# EAGLE board XC95114XL_trainer (EAGLE 7.1.0)
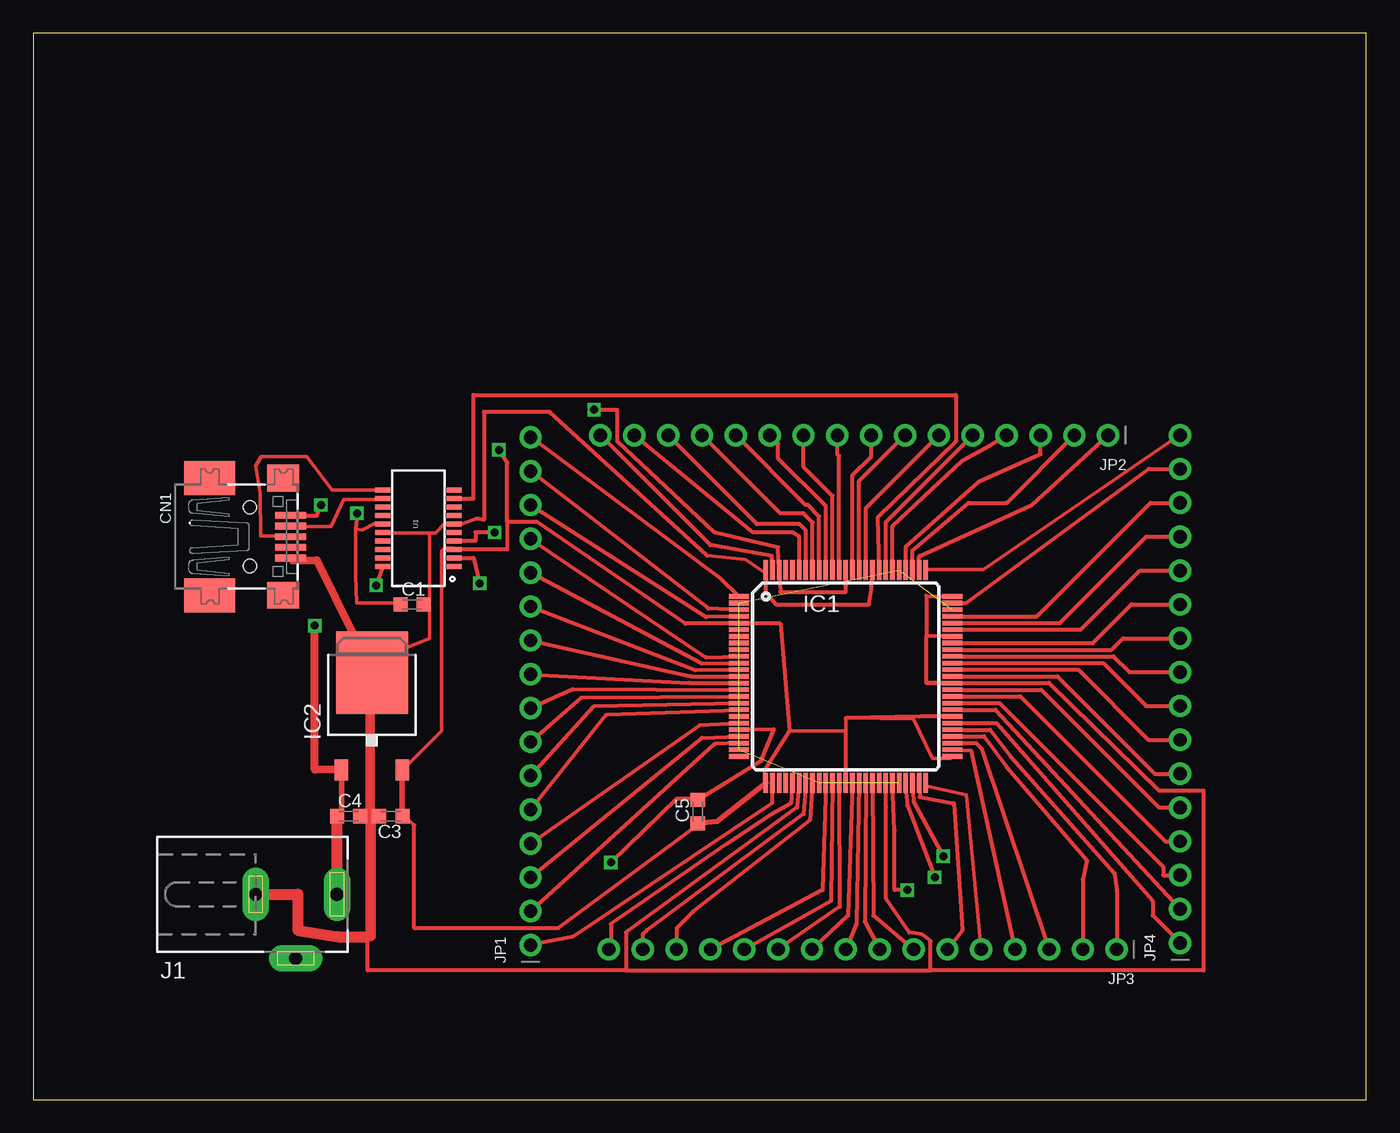
[diagram p0: board, top side]
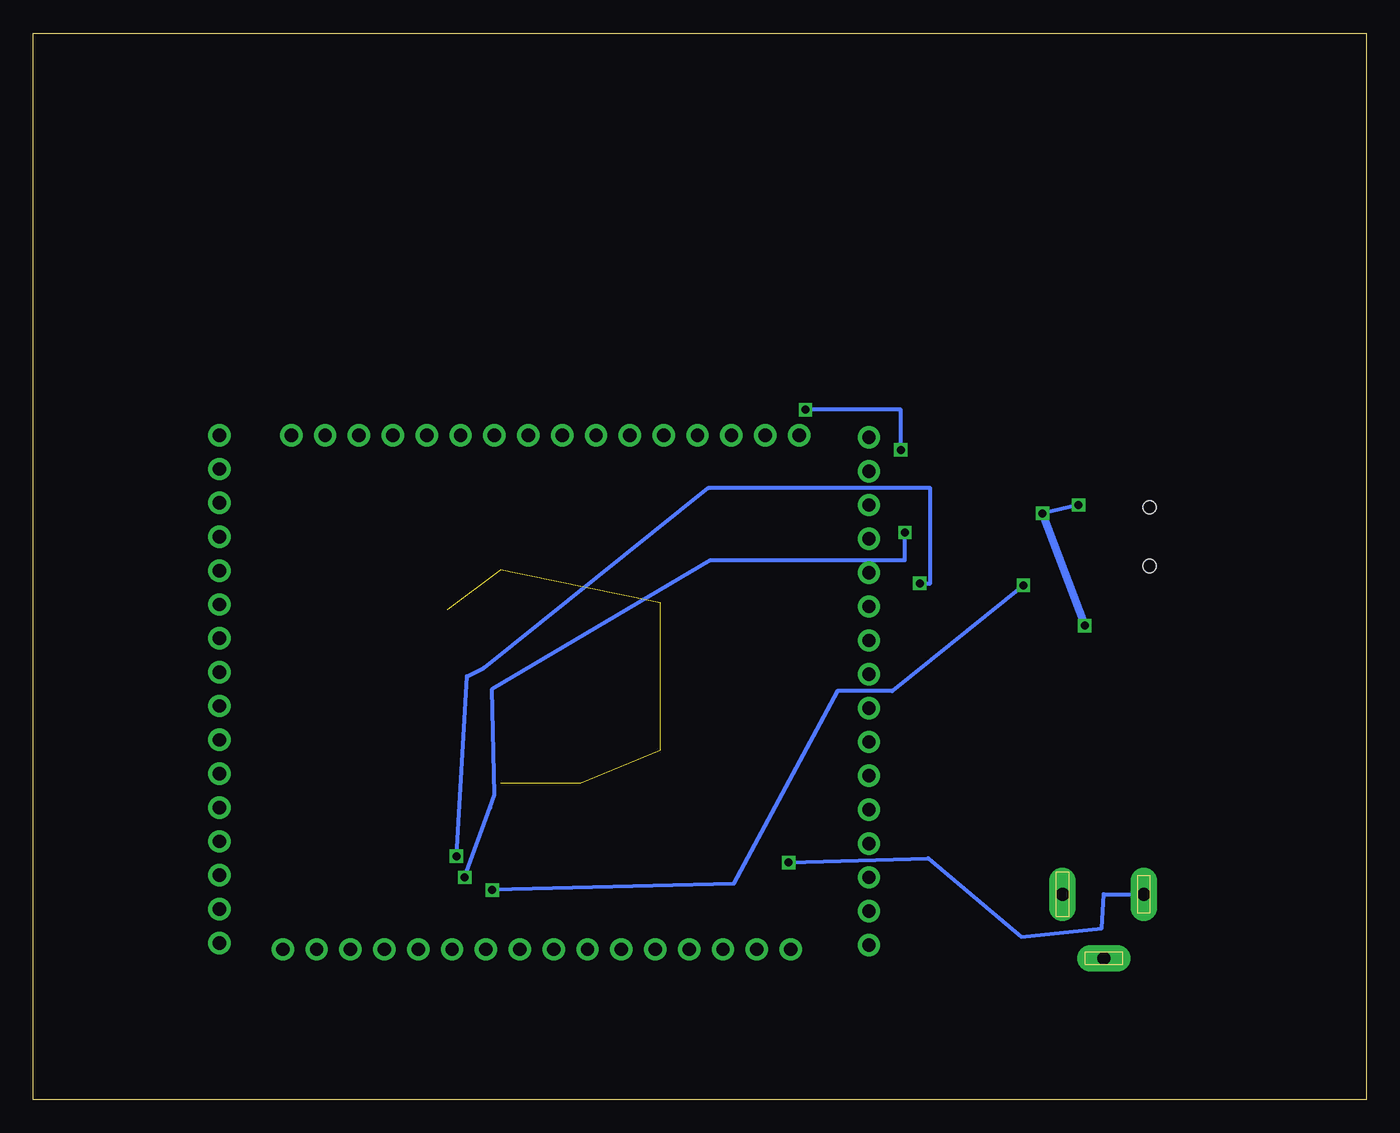
[diagram p1: board, bottom side, seen from below]

Size 100 x 80 mm. Coordinates in mm from the lower left corner, seen from the top.
Outline: 0,0 100,0 100,80 0,80 0,0
Copper layers (1*16): Top 0.035mm / dielectric 1.5mm / Bottom 0.035mm
Design rules "default": minimum track width 10mil, minimum drill 24mil, track to track 8mil, track to pad 8mil, pad to pad 8mil, via to via 8mil, smd to smd 8mil, copper to edge 40mil, drill to drill 8mil, minimum pad ring 10mil, minimum via ring 8mil, stop-mask expansion 4mil, vias tented up to drill 0mil, thermal gap 10mil
vRestrict: area 27,38.4 to 30.8,47.3; area 73,-11.7 to 86.7,2.9

## Footprints (pad centres in the part's own frame; a part is rotated, then mirrored left to right if it is on the bottom)
C0603K = smd 1.05 x 1.08: 1 -0.875,0; 2 0.875,0
USB-MINIB_LARGER = smd 0.5 x 2.308: D+ 0,4.064; D- -0.8,4.064; GND 1.6,4.064; ID 0.8,4.064; VBUS -1.6,4.064 | smd 2.54 x 3.81: GND1 -4.4,-2; GND4 4.4,-2 | smd 2 x 2.4: GND2 -4.4,3.5; GND3 4.4,3.5 | hole 1: -2.2,1; 2.2,1
TQ100 = smd 1.5 x 0.35: 1 -8,6; 2 -8,5.5; 3 -8,5; 4 -8,4.5; 5 -8,4; 6 -8,3.5; 7 -8,3; 8 -8,2.5; 9 -8,2; 10 -8,1.5; 11 -8,1; 12 -8,0.5; 13 -8,0; 14 -8,-0.5; 15 -8,-1; 16 -8,-1.5; 17 -8,-2; 18 -8,-2.5; 19 -8,-3; 20 -8,-3.5; 21 -8,-4; 22 -8,-4.5; 23 -8,-5; 24 -8,-5.5; 25 -8,-6; 51 8,-6; 52 8,-5.5; 53 8,-5; 54 8,-4.5; 55 8,-4; 56 8,-3.5; 57 8,-3; 58 8,-2.5; 59 8,-2; 60 8,-1.5; 61 8,-1; 62 8,-0.5; 63 8,0; 64 8,0.5; 65 8,1; 66 8,1.5; 67 8,2; 68 8,2.5; 69 8,3; 70 8,3.5; 71 8,4; 72 8,4.5; 73 8,5; 74 8,5.5; 75 8,6 | smd 0.35 x 1.5: 26 -6,-8; 27 -5.5,-8; 28 -5,-8; 29 -4.5,-8; 30 -4,-8; 31 -3.5,-8; 32 -3,-8; 33 -2.5,-8; 34 -2,-8; 35 -1.5,-8; 36 -1,-8; 37 -0.5,-8; 38 0,-8; 39 0.5,-8; 40 1,-8; 41 1.5,-8; 42 2,-8; 43 2.5,-8; 44 3,-8; 45 3.5,-8; 46 4,-8; 47 4.5,-8; 48 5,-8; 49 5.5,-8; 50 6,-8; 76 6,8; 77 5.5,8; 78 5,8; 79 4.5,8; 80 4,8; 81 3.5,8; 82 3,8; 83 2.5,8; 84 2,8; 85 1.5,8; 86 1,8; 87 0.5,8; 88 0,8; 89 -0.5,8; 90 -1,8; 91 -1.5,8; 92 -2,8; 93 -2.5,8; 94 -3,8; 95 -3.5,8; 96 -4,8; 97 -4.5,8; 98 -5,8; 99 -5.5,8; 100 -6,8
TO252 = smd 1 x 1.6: 1 -2.28,-4.8; 2 2.28,-4.8 | smd 5.4 x 6.2: 3 0,2.5
DCJ0303 = drill 1 pad 2 long: 1 0,3.1; 2 4.8,0; 3 0,-3
1X16_ROUND = drill 1 pad 1.676: 1 -19.05,0; 2 -16.51,0; 3 -13.97,0; 4 -11.43,0; 5 -8.89,0; 6 -6.35,0; 7 -3.81,0; 8 -1.27,0; 9 1.27,0; 10 3.81,0; 11 6.35,0; 12 8.89,0; 13 11.43,0; 14 13.97,0; 15 16.51,0; 16 19.05,0
SSOP20_L = smd 0.381 x 1.143: 1 -2.857,-2.68; 2 -2.223,-2.68; 3 -1.587,-2.68; 4 -0.953,-2.68; 5 -0.318,-2.68; 6 0.318,-2.68; 7 0.953,-2.68; 8 1.587,-2.68; 9 2.223,-2.68; 10 2.857,-2.68; 11 2.857,2.68; 12 2.223,2.68; 13 1.587,2.68; 14 0.953,2.68; 15 0.318,2.68; 16 -0.318,2.68; 17 -0.953,2.68; 18 -1.587,2.68; 19 -2.223,2.68; 20 -2.857,2.68

## Placement (x,y rotation side)
C1  [C0603K]  28.42,37.15 0 top
C3  [C0603K]  26.83,21.27 180 top
C4  [C0603K]  23.65,21.27 0 top
C5  [C0603K]  49.85,21.59 90 top
CN1  [USB-MINIB_LARGER]  15.24,42.23 270 top
IC1  XC9572XL-TQ100  [TQ100]  60.96,31.75 0 top
IC2  7805DT  [TO252]  25.4,29.53 0 top
J1  [DCJ0303]  19.68,15.4 270 top
JP1  [1X16_ROUND]  37.31,30.64 90 top
JP2  [1X16_ROUND]  61.59,49.85 180 top
JP3  [1X16_ROUND]  62.23,11.27 180 top
JP4  [1X16_ROUND]  86.04,30.8 90 top
U1  FTS31XS-U  [SSOP20_L]  28.89,42.86 90 top

## Library data of the parts
C1 C3-C5 = rcl
CN1 JP1-JP4 = OLED_mod
IC1 = XC9500XLneu
IC2 = linear
J1 = con-jack; OC_FARNELL: unknown; OC_NEWARK: unknown
U1 = SparkFun-DigitalIC; PROD_ID: IC-11524

## Nets
3.3V: C3.1 C5.1 IC1.5 IC1.26 IC1.38 IC1.51 IC1.57 IC1.88 IC1.98 IC2.2 U1.3
+5V: C1.1 C4.1 CN1.VBUS IC2.1 J1.1 U1.15
GND: C1.2 C3.2 C4.2 C5.2 CN1.GND IC1.21 IC1.31 IC1.44 IC1.62 IC1.69 IC1.75 IC1.84 IC1.100 IC2.3 J1.3 U1.6 U1.16
N$1: CN1.D+ U1.11
N$3: CN1.D- U1.12
N$4: IC1.55 JP3.1
N$5: IC1.54 JP3.2
N$6: IC1.48 U1.2
N$7: IC1.53 JP3.3
N$8: IC1.47 U1.4
N$9: IC1.45 U1.20
N$10: IC1.83 U1.9
N$11: IC1.52 JP3.4
N$12: IC1.50 JP3.5
N$13: IC1.49 JP3.6
N$14: IC1.42 JP3.7
N$15: IC1.41 JP3.8
N$16: IC1.40 JP3.9
N$17: IC1.39 JP3.10
N$18: IC1.37 JP3.11
N$19: IC1.36 JP3.12
N$20: IC1.35 JP3.13
N$21: IC1.33 JP3.14
N$22: IC1.32 JP3.15
N$23: IC1.30 JP3.16
N$24: IC1.22 JP1.3
N$25: IC1.23 JP1.2
N$26: IC1.27 JP1.1
N$27: IC1.20 JP1.4
N$28: IC1.18 JP1.5
N$29: IC1.17 JP1.6
N$30: IC1.16 JP1.7
N$31: IC1.15 JP1.8
N$32: IC1.14 JP1.9
N$33: IC1.13 JP1.10
N$34: IC1.12 JP1.11
N$35: IC1.11 JP1.12
N$36: IC1.10 JP1.13
N$37: IC1.1 JP1.16
N$38: IC1.3 JP1.15
N$39: IC1.4 JP1.14
N$40: IC1.56 JP4.1
N$41: IC1.58 JP4.2
N$42: IC1.59 JP4.3
N$43: IC1.60 JP4.4
N$44: IC1.61 JP4.5
N$45: IC1.63 JP4.6
N$46: IC1.64 JP4.7
N$47: IC1.65 JP4.8
N$48: IC1.66 JP4.9
N$49: IC1.67 JP4.10
N$50: IC1.68 JP4.11
N$51: IC1.70 JP4.12
N$52: IC1.71 JP4.13
N$53: IC1.72 JP4.14
N$54: IC1.74 JP4.15
N$55: IC1.76 JP4.16
N$56: IC1.77 JP2.1
N$57: IC1.78 JP2.2
N$58: IC1.79 JP2.3
N$59: IC1.81 JP2.4
N$60: IC1.82 JP2.5
N$61: IC1.85 JP2.6
N$62: IC1.86 JP2.7
N$63: IC1.87 JP2.8
N$64: IC1.89 JP2.9
N$65: IC1.90 JP2.10
N$66: IC1.91 JP2.11
N$67: IC1.92 JP2.12
N$68: IC1.93 JP2.13
N$69: IC1.94 JP2.14
N$70: IC1.95 JP2.15
N$71: IC1.99 JP2.16
NC: IC1.2 IC1.7 IC1.19 IC1.24 IC1.34 IC1.43 IC1.46 IC1.73 IC1.80

## Tracks (layer width: path | path; a pad name or v marks a point on that pad's centre or on a via)
3.3V  (via drill 0.6)
  Top 0.254: IC1.51 68.81,25.6 67.47,25.6 66.04,28.57 60.96,28.62 60.96,27.67 56.73,27.67 54.86,24.69 54.86,23.77 IC1.26 | U1.3 31.55,41.38 30.86,41.38 30.63,41.15 30.63,27.66 27.89,24.92 IC2.2 | 28.57,20.57 27.89,21.26 C3.1 | 49.84,20.57 C5.1
  Top 0.305: IC1.57 66.52,28.73 60.96,28.62 | IC1.38 60.96,27.67 | 49.84,20.57 39.37,12.86 28.57,12.86 28.57,20.57 | IC1.88 60.96,38.1 56.04,38.1 IC1.98 55.88,41.43 51.12,42.55 43.81,49.37 43.81,51.75 v42.07,51.75 | IC1.5 56.04,35.72 | 56.04,35.72 56.73,27.67 | 56.04,35.72 48.9,35.72 37.78,43.34 35.56,43.34 | 35.56,43.34 35.56,41.27 31.59,41.27 | 35.56,43.34 35.56,47.78 v34.92,48.74
  Top 0.406: C5.1 51.31,20.87 IC1.26 | C3.1 27.68,21.27 IC2.2
  Bottom 0.305: v34.92,48.74 34.92,51.75 v42.07,51.75
+5V  (via drill 0.6)
  Top 0.254: C1.1 27.89,37.26 24.24,37.26 24.17,39.32 24.19,42.79 24.67,42.75 25.6,43.2 26.06,43.2 U1.15
  Top 0.305: CN1.VBUS 21.27,43.81 v21.59,44.61 | v24.29,43.97 24.19,42.79
  Top 0.406: C4.1 23.12,21.27 IC2.1
  Top 0.61: IC2.1 21.11,24.77 v21.11,35.56
  Top 0.813: J1.1 C4.1
  Bottom 0.305: v21.59,44.61 v24.29,43.97
  Bottom 0.61: v21.11,35.56 v24.29,43.97
GND  (via drill 0.6)
  Top 0.254: 50.55,40.8 53.42,40.5 54.86,39.55 IC1.100 | 29.72,42.52 30.18,42.52 30.86,43.2 31.55,43.2 U1.6 31.77,43.2 32.23,43.2 33.26,43.59 | 29.72,42.52 26.29,42.52 U1.16 | 26.75,33.38 25.6,32.23 IC2.3 26.75,33.38 | 26.75,33.38 29.72,34.6 29.72,37.03 C1.2 29.72,37.26 29.72,42.52 | 26.75,33.38 26.52,33.38 | 19.43,40.46 CN1.GND
  Top 0.305: 52.96,27.78 IC1.21 55.56,27.78 54.61,25.4 | C5.2 54.61,25.4 | 50.55,40.8 38.73,51.59 33.81,51.59 33.81,43.5 33.26,43.59 | IC1.100 54.93,38.1 55.72,37.15 62.71,37.15 62.87,38.26 IC1.84 | IC1.62 66.99,31.27 | 66.99,31.27 66.99,34.77 | IC1.69 66.99,34.77 | IC1.75 66.99,37.78 66.99,34.77 | 44.45,9.68 67.31,9.68 | 67.31,9.68 67.31,11.91 66.67,12.38 65.72,12.54 63.98,15.08 63.98,21.91 IC1.44 | IC1.31 57.31,21.91 44.45,12.54 44.45,9.68 | 44.45,9.68 25.08,9.68 25.08,12.22 25.08,21.27 | 66.99,31.27 76.2,31.27 84.45,23.18 87.79,23.18 87.79,9.68 67.31,9.68 | 54.61,25.4 50.01,22.54 48.26,22.54 v43.34,17.78
  Top 0.406: C4.2 25.08,21.27 C3.2 25.4,21.27 25.4,21.59 IC2.3
  Top 0.61: 25.08,12.22 25.4,12.22 25.4,21.59 25.24,21.59 25.24,30.96 | 19.43,40.46 21.27,40.48 IC2.3
  Top 0.813: J1.3 19.84,15.4 19.84,12.7 22.86,12.22 25.08,12.22
  Bottom 0.305: v43.34,17.78 32.86,18.1 25.88,12.22 19.84,12.86 19.68,15.4 J1.3
N$1
  Top 0.254: U1.11 22.4,45.72 20.52,48.23 17.07,48.23 16.69,47.53 17,45.51 17.05,42.29 19.2,42.29 CN1.D+
N$3
  Top 0.254: U1.12 26.06,45.03 23.3,45.03 22.35,42.98 19.43,42.98 CN1.D-
N$4
  Top 0.305: IC1.55 71.79,27.75 73.34,25.72 81.12,16.99 81.28,15.72 JP3.1
N$5
  Top 0.305: IC1.54 71.33,27.25 73.03,24.92 79.06,17.94 78.74,16.51 JP3.2
N$6  (via drill 0.6)
  Top 0.305: U1.2 33.02,40.64 v33.5,38.73 | IC1.48 66.04,22.38 v68.26,18.26
  Bottom 0.305: v33.5,38.73 32.7,38.73 32.7,45.88 49.37,45.88 66.2,32.38 67.47,31.75 v68.26,18.26
N$7
  Top 0.305: IC1.53 70.72,26.75 71.12,26.35 JP3.3
N$8  (via drill 0.6)
  Top 0.305: IC1.47 65.41,23.75 65.56,22.07 v67.63,16.67 | v34.61,42.55 33.18,42.55 33.18,41.91 U1.4
  Bottom 0.305: v67.63,16.67 65.72,21.91 65.41,22.86 65.56,30.8 49.21,40.48 34.61,40.48 v34.61,42.55
N$9  (via drill 0.6)
  Top 0.305: U1.20 v25.72,38.58 | v65.56,15.72 64.61,15.72 64.61,20.16 IC1.45
  Bottom 0.305: v25.72,38.58 35.56,30.64 39.69,30.64 47.47,16.19 v65.56,15.72
N$10
  Top 0.305: U1.9 33.02,45.09 33.02,52.86 69.22,52.86 69.22,49.37 63.34,43.66 IC1.83
N$11
  Top 0.305: IC1.52 70.33,26.19 JP3.4
N$12
  Top 0.254: IC1.50 66.98,23.55 70,22.85 71.09,11.43 JP3.5
N$13
  Top 0.305: IC1.49 66.52,22.7 69.06,22.23 69.69,12.7 JP3.6
N$14
  Top 0.305: IC1.42 63.02,13.81 JP3.7
N$15
  Top 0.305: IC1.41 62.39,13.34 JP3.8
N$16
  Top 0.305: IC1.40 61.75,13.18 JP3.9
N$17
  Top 0.305: IC1.39 61.12,13.81 JP3.10
N$18
  Top 0.305: IC1.37 60.48,14.45 JP3.11
N$19
  Top 0.305: IC1.36 59.85,14.92 JP3.12
N$20
  Top 0.305: IC1.35 59.21,15.72 JP3.13
N$21
  Top 0.305: IC1.33 58.26,20.95 49.53,14.13 48.26,12.86 JP3.14
N$22
  Top 0.305: IC1.32 57.78,21.43 46.04,12.7 45.72,12.38 JP3.15
N$23
  Top 0.305: IC1.30 56.83,22.23 55.4,21.43 52.07,19.21 43.34,13.18 43.34,11.27 JP3.16
N$24
  Top 0.305: JP1.3 50.16,27.15 IC1.22
N$25
  Top 0.305: IC1.23 51.12,26.67 JP1.2
N$26
  Top 0.305: IC1.27 55.4,22.23 40.48,12.22 JP1.1
N$27
  Top 0.305: JP1.4 50.01,28.1 IC1.20
N$28
  Top 0.305: JP1.5 43.02,28.89 IC1.18
N$29
  Top 0.305: JP1.6 42.07,29.53 IC1.17
N$30
  Top 0.305: JP1.7 41.12,30.16 IC1.16
N$31
  Top 0.305: JP1.8 40.48,30.8 IC1.15
N$32
  Top 0.305: JP1.9 49.21,31.27 IC1.14
N$33
  Top 0.305: JP1.10 49.37,31.75 IC1.13
N$34
  Top 0.305: JP1.11 49.69,32.23 IC1.12
N$35
  Top 0.305: JP1.12 50.16,32.7 IC1.11
N$36
  Top 0.305: JP1.13 50.48,33.18 IC1.10
N$37
  Top 0.305: IC1.1 51.59,39.05 JP1.16
N$38
  Top 0.305: IC1.3 50.64,36.83 JP1.15
N$39
  Top 0.305: IC1.4 50.48,36.2 JP1.14
N$40
  Top 0.305: IC1.56 72.24,28.25 83.98,14.92 83.98,13.81 JP4.1
N$41
  Top 0.305: IC1.58 72.19,29.25 JP4.2
N$42
  Top 0.305: IC1.59 72.48,29.75 84.77,17.46 84.77,16.83 JP4.3
N$43
  Top 0.305: IC1.60 74.05,30.25 84.93,19.37 JP4.4
N$44
  Top 0.305: IC1.61 75.61,30.75 84.45,21.91 JP4.5
N$45
  Top 0.305: IC1.63 76.83,31.75 84.14,24.45 JP4.6
N$46
  Top 0.305: IC1.64 78.4,32.25 83.66,26.99 JP4.7
N$47
  Top 0.305: IC1.65 80.28,32.75 83.5,29.53 JP4.8
N$48
  Top 0.305: IC1.66 81.05,33.25 82.23,32.07 JP4.9
N$49
  Top 0.305: IC1.67 80.9,33.75 81.76,34.61 JP4.10
N$50
  Top 0.305: IC1.68 79.49,34.25 82.39,37.15 JP4.11
N$51
  Top 0.305: IC1.70 78.59,35.25 83.03,39.69 JP4.12
N$52
  Top 0.305: IC1.71 77.03,35.75 83.5,42.23 JP4.13
N$53
  Top 0.305: IC1.72 75.3,36.25 83.82,44.77 JP4.14
N$54
  Top 0.305: IC1.74 69.95,37.25 83.66,47.31 JP4.15
N$55
  Top 0.254: IC1.76 66.98,39.78 71.29,39.78 85.95,49.84 JP4.16
N$56
  Top 0.305: IC1.77 66.46,40.74 66.52,40.8 74.93,44.61 JP2.1
N$57
  Top 0.305: IC1.78 65.96,41.2 70.17,44.77 73.03,44.77 JP2.2
N$58
  Top 0.305: IC1.79 65.46,41.49 70.96,46.35 75.56,48.42 JP2.3
N$59
  Top 0.305: IC1.81 64.46,43.03 69.69,47.94 71.75,49.05 JP2.4
N$60
  Top 0.305: IC1.82 63.96,43.32 JP2.5
N$61
  Top 0.305: IC1.85 62.46,44.36 JP2.6
N$62
  Top 0.305: IC1.86 61.96,46.4 JP2.7
N$63
  Top 0.305: IC1.87 61.46,46.85 62.87,48.26 JP2.8
N$64
  Top 0.305: IC1.89 60.46,48.28 60.33,48.42 JP2.9
N$65
  Top 0.305: IC1.90 59.96,45.29 57.78,47.47 JP2.10
N$66
  Top 0.305: IC1.91 59.46,44.52 55.88,48.1 55.88,49.21 JP2.11
N$67
  Top 0.305: IC1.92 58.96,43.75 58.1,44.61 57.94,44.61 JP2.12
N$68
  Top 0.305: IC1.93 58.46,43.3 57.78,43.97 56.04,43.97 JP2.13
N$69
  Top 0.305: IC1.94 57.96,42.69 57.47,43.18 54.29,43.18 JP2.14
N$70
  Top 0.305: IC1.95 57.47,42.23 56.99,42.55 53.98,42.55 JP2.15
N$71
  Top 0.305: IC1.99 55.4,39.75 55.4,40.8 50.8,41.59 JP2.16
NC  (8 unrouted)